# Altium PCB ALTAIR_PD_Squad_V26.5a_cut.PcbDoc (part 4 of 4)
Units mm, origin at the board's own origin, x right, y up, seen from the top; angles counter-clockwise.
Board outline 74 x 56 mm, 4 copper layers (Top Layer, Layer 2, Layer 3, Bottom Layer), stack 1.818 mm thick; 213 components, 155 nets, 610 pads, 404 vias.
Unrouted connection lines stored in the file: 6.
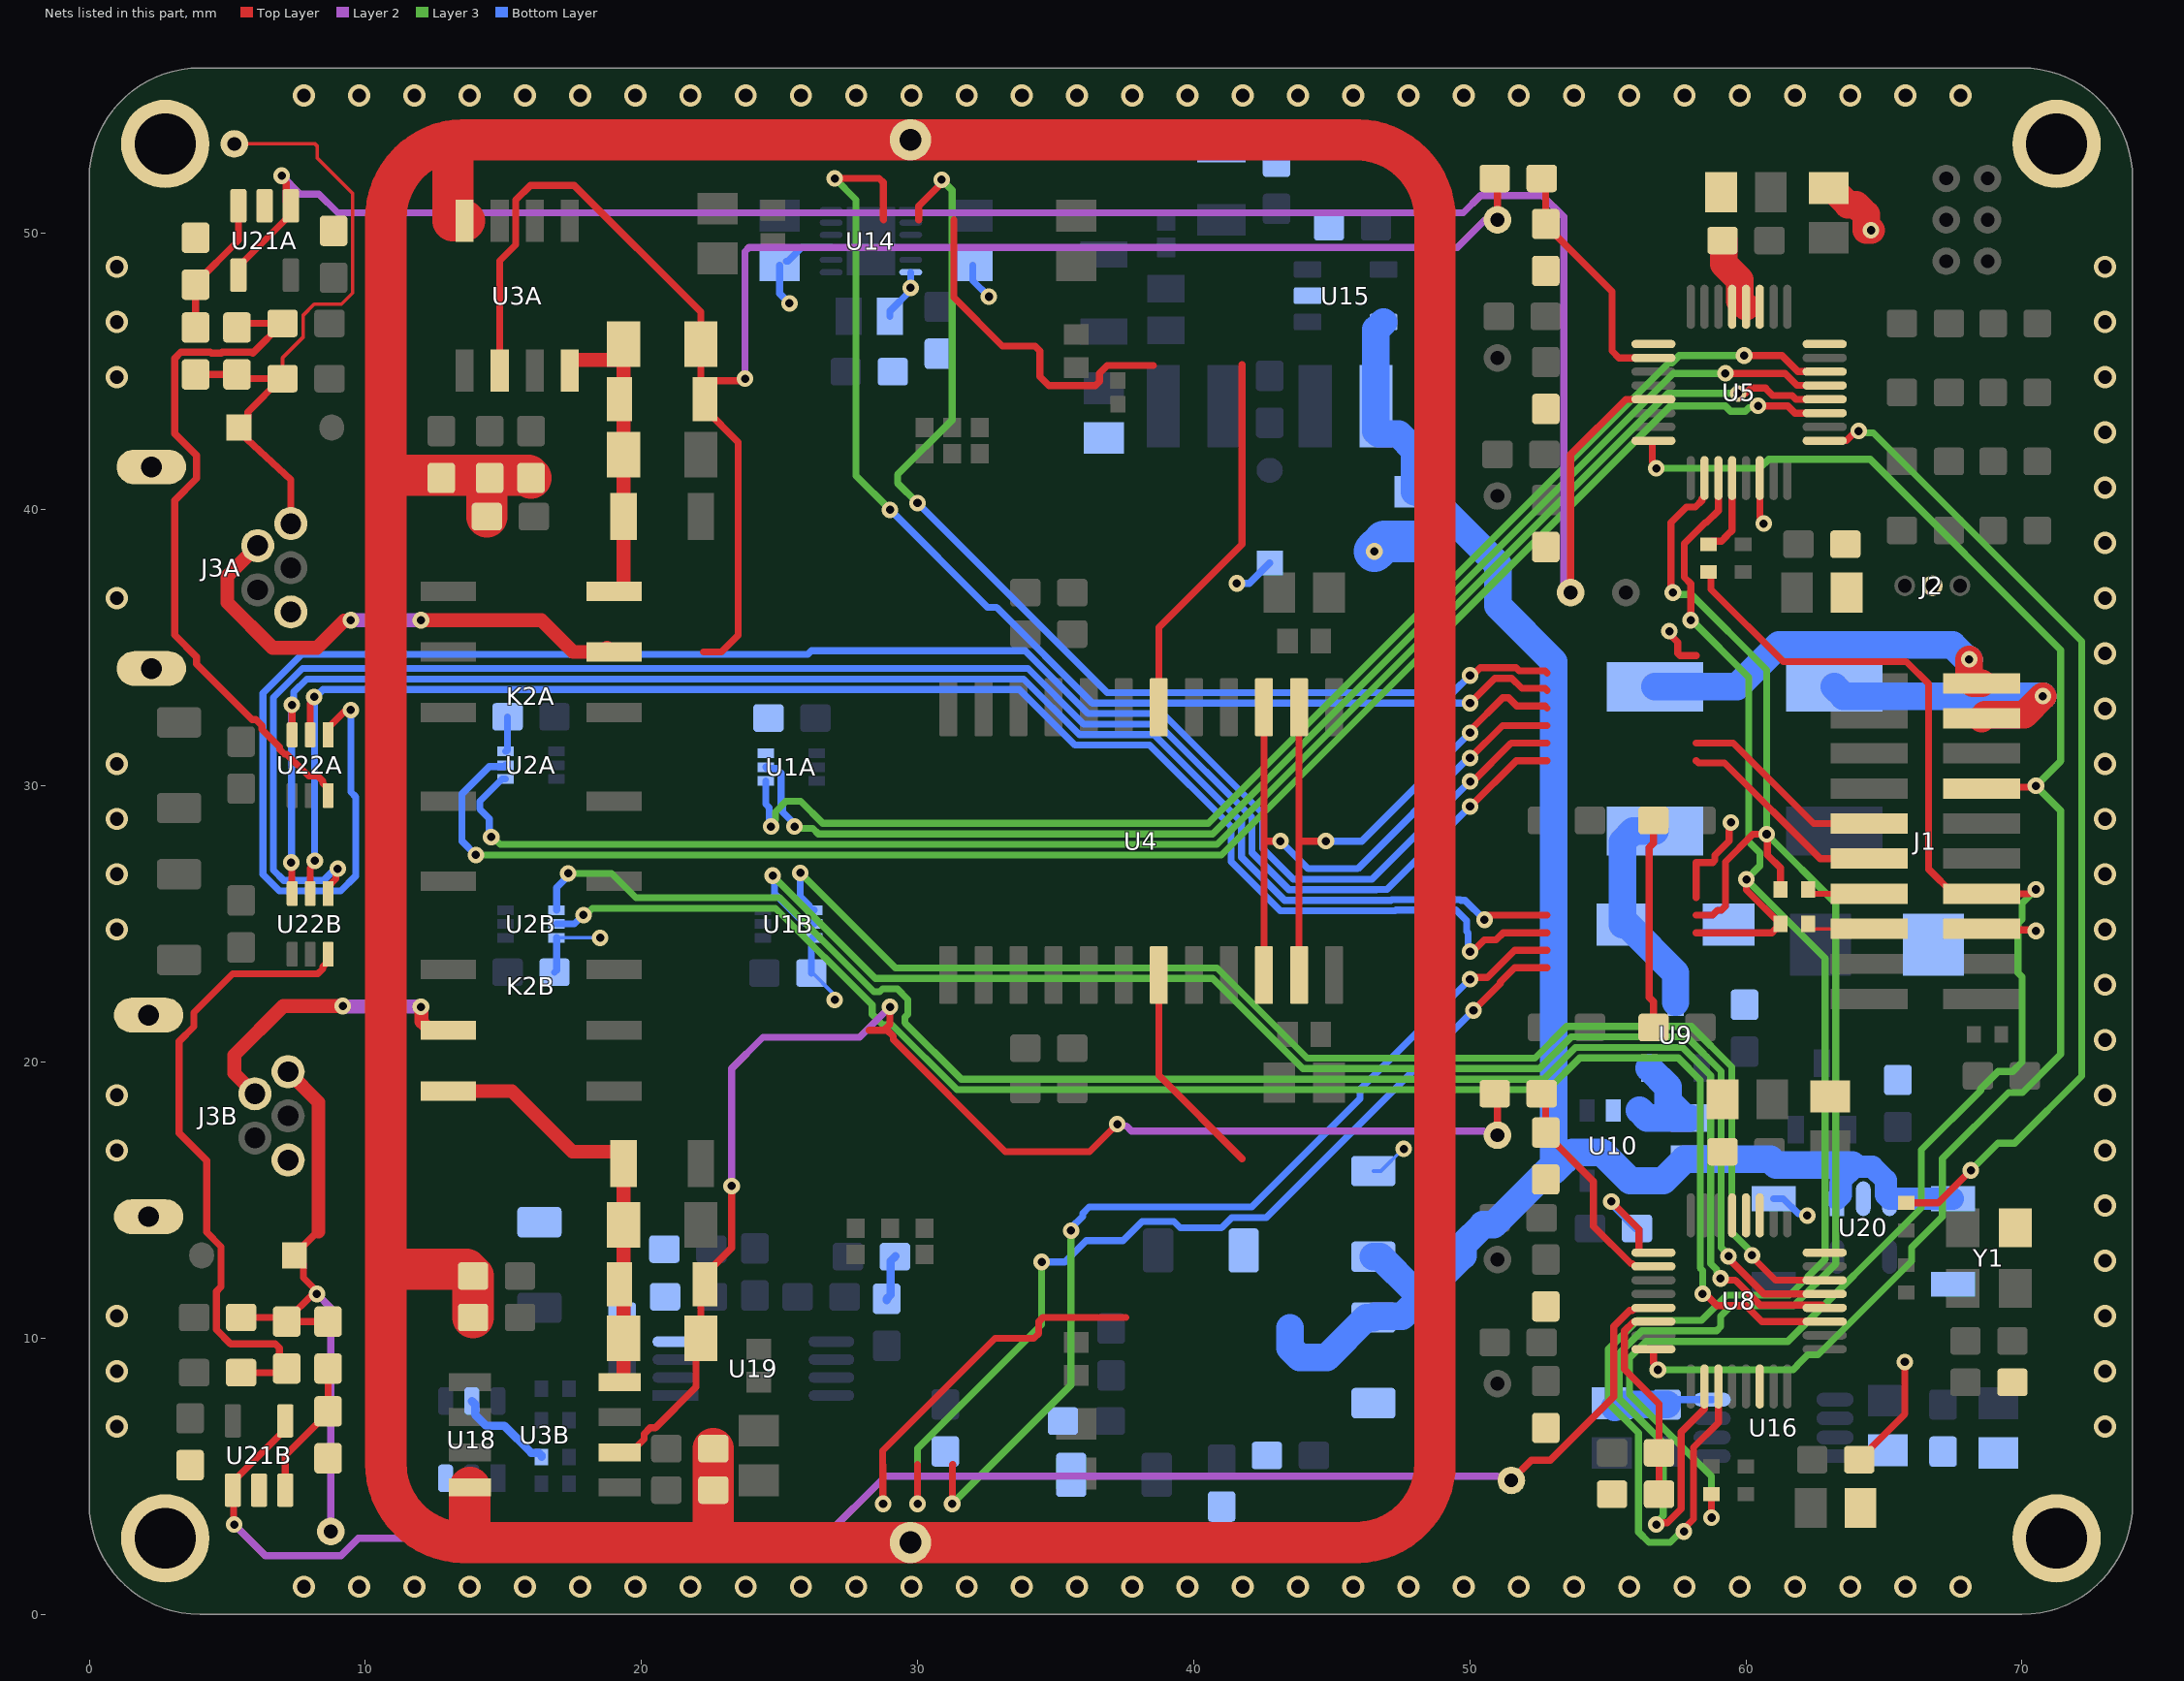
[diagram p5: the nets of this part, all layers, seen from the top]

## Via types
v1: diameter 0.6, hole 0.3, Top Layer to Bottom Layer, tented both sides, 303 vias
v2: diameter 0.8, hole 0.5, Top Layer to Bottom Layer, 97 vias
v3: diameter 0.6, hole 0.3, Top Layer to Bottom Layer, 4 vias

## Nets (pads, with @x,y where several pads share a name; then routed paths per layer and width w, separated by ;. In a path a pad name is that pad's centre, name@x,y a point inside that pad or via, vN(x,y) a via of type N, cw(c..) or ccw(c..) an arc to the next point about the centre after c; other vN are vias at no path point) (continued)
NetR51_1: R51.1 U18.5 | length 3.6
  Bottom Layer w0.3: U18.5@13.854,7.724 13.979,7.599 13.979,7.224 14.379,6.824 15.029,6.824 16.004,5.849 16.279,5.849 16.379,5.749 R51.1@16.379,5.699
NetR56A_1: R56A.1 R57A.2 U21A.3 | length 5.1
  Top Layer w0.254: R56A.1@3.85,46.5 R57A.2@3.85,48.15 ; R57A.2@3.85,48.2 5.4,49.75 5.4,50.95 U21A.3@5.35,51
NetR56B_1: R56B.1 R57B.2 U21B.3 | length 5
  Top Layer w0.254: U21B.3@7.1,4.55 7.1,5.75 R57B.2@8.65,7.3 ; R57B.2@8.65,7.35 R56B.1@8.65,9
NetU1A_1: U1A.1 U5.22 | length 48.1
  Top Layer w0.254: v1(59.935,45.585) 61.307,45.585 61.883,45.009 62.841,45.009 U5.22@62.85,45
  Layer 3 w0.254: v1(24.688,28.528) 24.688,28.622 24.853,28.786 24.853,29.062 25.232,29.441 25.768,29.441 26.566,28.643 40.527,28.643 57.202,45.319 57.319,45.319 57.585,45.585 v1(59.935,45.585)
  Bottom Layer w0.254: U1A.1@24.499,30.18 24.499,29.336 24.626,29.209 24.626,28.59 v1(24.688,28.528)
NetU1A_2: U1A.2 U5.21 | length 47.3
  Top Layer w0.254: v1(59.255,44.938) 61.415,44.938 61.844,44.509 62.841,44.509 U5.21@62.85,44.5
  Layer 3 w0.254: v1(25.542,28.528) 25.609,28.462 26.208,28.462 26.408,28.262 40.684,28.262 57.36,44.938 v1(59.255,44.938)
  Bottom Layer w0.254: U1A.2@24.499,30.68 24.547,30.632 24.881,30.632 25.053,30.46 25.053,29.31 25.118,29.246 25.118,29.047 25.542,28.622 v1(25.542,28.528)
NetU1B_1: U1B.1 U8.22 | length 49.4
  Top Layer w0.254: v1(60.222,13) 60.222,12.943 61.065,12.1 U8.22@62.85,12.1
  Layer 3 w0.254: v1(25.75,26.853) 29.194,23.409 40.841,23.409 44.107,20.143 52.362,20.143 53.509,21.29 58.018,21.29 59.484,19.825 59.484,13.832 60.222,13.094 v1(60.222,13)
  Bottom Layer w0.254: v1(25.75,26.853) 25.75,26 26.077,25.673 26.077,25.548 26.125,25.5 U1B.1@26.25,25.5
NetU1B_2: U1B.2 U8.21 | length 51.7
  Top Layer w0.254: v1(59.369,12.966) 59.369,12.881 60.65,11.6 U8.21@62.85,11.6
  Layer 3 w0.254: v1(24.75,26.75) 28.472,23.028 40.683,23.028 43.949,19.762 52.519,19.762 53.666,20.909 57.861,20.909 59.103,19.667 59.103,13.288 59.369,13.022 v1(59.369,12.966)
  Bottom Layer w0.254: v1(24.75,26.75) 24.816,26.684 24.816,26.1 25.868,25.048 26.202,25.048 U1B.2@26.25,25
NetU2A_1: U2A.1 U5.20 | length 58.1
  Top Layer w0.254: v1(59.709,44.214) 59.973,44.214 60.168,44.409 60.704,44.409 60.806,44.306 60.972,44.141 61.673,44.141 61.814,44 U5.20@62.85,44
  Layer 3 w0.254: v1(14.557,28.147) 14.613,28.147 14.879,27.881 40.842,27.881 57.175,44.214 v1(59.709,44.214)
  Bottom Layer w0.254: v1(14.557,28.147) 14.491,28.213 14.491,28.815 14.147,29.159 14.147,29.447 14.95,30.25 U2A.1@15.075,30.25
NetU2A_2: U2A.2 U5.19 | length 60.3
  Top Layer w0.254: v1(60.436,43.762) 60.438,43.76 61.515,43.76 61.775,43.5 U5.19@62.85,43.5
  Layer 3 w0.254: v1(14,27.5) 41,27.5 57.262,43.762 59.246,43.762 59.441,43.567 59.977,43.567 60.105,43.695 60.369,43.695 v1(60.436,43.762)
  Bottom Layer w0.254: v1(14,27.5) 13.5,28 13.5,29.713 14.489,30.702 15.027,30.702 U2A.2@15.075,30.75
NetU2B_1: U2B.1 U8.20 | length 59.3
  Top Layer w0.254: v1(59.076,12.164) 59.142,12.098 59.613,12.098 60.515,11.196 62.754,11.196 U8.20@62.85,11.1
  Layer 3 w0.254: v1(17.346,26.831) 18.919,26.831 19.8,25.95 25.012,25.95 28.418,22.543 28.628,22.543 28.732,22.647 29.268,22.647 29.647,22.268 29.647,21.732 29.543,21.628 29.543,21.418 31.58,19.381 52.677,19.381 53.824,20.528 57.703,20.528 58.722,19.509 58.722,12.698 58.938,12.481 58.938,12.395 59.076,12.258 v1(59.076,12.164)
  Bottom Layer w0.254: U2B.1@16.925,25.5 16.925,26.317 17.346,26.738 v1(17.346,26.831)
NetU2B_2: U2B.2 U8.19 | length 58
  Top Layer w0.254: v1(58.432,11.603) 58.526,11.603 58.952,11.177 59.996,11.177 60.572,10.6 U8.19@62.85,10.6
  Layer 3 w0.254: v1(17.897,25.325) 17.976,25.325 18.219,25.569 24.854,25.569 28.353,22.069 28.353,21.732 28.732,21.353 29.069,21.353 31.422,19 52.835,19 53.982,20.147 57.545,20.147 58.341,19.351 58.341,12.54 58.429,12.452 58.429,11.606 v1(58.432,11.603)
  Bottom Layer w0.254: U2B.2@16.925,25 17.572,25 v1(17.897,25.325)
NetU4_7: U4.7 | length 7.9
  Top Layer w0.254: U4.7@38.735,23.15 38.735,19.515 41.75,16.5
NetU4_10: U4.10 U4.15 | length 22.5
  Top Layer w0.254: U4.10@42.545,23.15 42.545,28 ; U4.15@42.545,32.85 42.545,28 ; v1(43.14,28) 42.545,28 ; v1(50.008,31.011) 51.179,32.183 52.8,32.183
  Bottom Layer w0.254: v1(43.14,28) 44.14,27 45.939,27 49.95,31.011 v1(50.008,31.011)
NetU4_11: U4.11 U4.14 | length 21
  Top Layer w0.254: U4.11@43.815,23.15 43.815,28 ; U4.14@43.815,32.85 43.815,28 ; v1(44.784,28) 43.815,28 ; v1(50.008,31.926) 50.008,32.008 51.192,33.192 51.402,33.192 51.698,32.896 52.722,32.896 52.8,32.818
  Bottom Layer w0.254: v1(44.784,28) 46.082,28 v1(50.008,31.926)
NetU4_18: U4.18 | length 13.6
  Top Layer w0.254: U4.18@38.735,32.85 38.735,35.735 41.75,38.75 41.75,45.25
NetU6A_10:  | length 12.4
  Top Layer w0.254: 31.31,50.5 31.31,47.69 33.071,45.929 34.252,45.929 34.429,45.752 34.429,44.821 34.75,44.5 36.439,44.5 36.588,44.649 36.588,44.947 36.87,45.229 38.546,45.229
NetU6A_11:  | length 40.9
  Top Layer w0.254: 30.04,50.5 30.04,51 30.804,51.764 30.804,51.884 v1(30.87,51.95) ; v1(50.008,34) 50.101,34 50.379,34.278 51.676,34.278 51.788,34.166 52.722,34.166 52.8,34.088
  Layer 3 w0.254: v1(29.997,40.247) 29.272,40.971 29.272,41.272 31.25,43.25 31.25,51.571 v1(30.87,51.95)
  Bottom Layer w0.254: v1(29.997,40.247) 36.862,33.381 49.389,33.381 v1(50.008,34)
NetU6A_12:  | length 43.3
  Top Layer w0.254: v1(27,52) 28.611,52 28.76,51.851 28.76,50.51 28.77,50.5 ; v1(50.008,33) 50.905,33.897 51.518,33.897 51.884,33.531 52.722,33.531 52.8,33.453
  Layer 3 w0.254: v1(27,52) 27.769,51.231 27.769,41.231 v1(29,40)
  Bottom Layer w0.254: v1(29,40) 32.533,36.467 32.862,36.467 36.328,33 v1(50.008,33)
NetU6B_10:  | length 13
  Top Layer w0.254: v1(28.75,4) 28.74,4.01 28.74,5.415 28.73,5.425 28.73,5.925 32.801,9.996 34.212,9.996 34.389,10.173 34.389,10.601 34.538,10.75 37.539,10.75
NetU6B_11:  | length 35
  Top Layer w0.254: v1(30,4) 30,5.425 ; v1(50.13,21.87) 51.106,22.845 51.106,22.899 51.619,23.413 52.8,23.413
  Layer 3 w0.254: v1(30,4) 30,6 34.491,10.491 v1(34.491,12.76)
  Bottom Layer w0.254: v1(34.491,12.76) 35.335,12.76 36.108,13.533 37.44,13.533 38.136,14.229 39.285,14.229 39.514,14 41.007,14 41.376,14.369 42.629,14.369 v1(50.13,21.87)
NetU6B_12:  | length 34.9
  Top Layer w0.254: v1(31.25,4) 31.26,4.01 31.26,5.415 31.27,5.425 ; v1(50.008,23) 50.074,23.066 50.638,23.066 51.619,24.048 52.8,24.048
  Layer 3 w0.254: v1(31.25,4) 35.555,8.305 v1(35.555,13.894)
  Bottom Layer w0.254: v1(35.555,13.894) 35.555,13.988 35.98,14.413 35.98,14.519 36.211,14.75 42.095,14.75 46.018,18.673 46.018,19.011 v1(50.008,23)
NetU12_14: U22A.1 | length 71.2
  Top Layer w0.254: U22A.1@8.65,31.85 8.65,32.1 9.234,32.684 9.406,32.684 v1(9.472,32.75) ; v1(50.011,30.157) 50.105,30.157 51.495,31.548 52.8,31.548
  Bottom Layer w0.254: v1(9.472,32.75) 9.472,29.781 9.647,29.607 9.647,26.732 9.11,26.195 6.889,26.195 6.287,26.797 6.287,33.358 7.693,34.764 26.02,34.764 26.154,34.898 33.892,34.898 36.171,32.619 38.881,32.619 42.493,29.007 42.493,27.732 43.606,26.619 44.881,26.619 46.454,26.619 49.992,30.157 v1(50.011,30.157)
NetU12_15: U22B.1 | length 62.5
  Top Layer w0.254: U22B.1@8.65,26.1 8.65,26.35 8.934,26.634 8.934,26.934 v1(9,27) ; v1(50.008,29.258) 50.027,29.258 51.681,30.913 52.8,30.913
  Bottom Layer w0.254: v1(9,27) 8.906,27 8.482,26.576 7.047,26.576 6.668,26.955 6.668,33.201 7.718,34.251 34,34.251 36.013,32.238 38.723,32.238 42.112,28.849 42.112,27.574 43.449,26.238 46.612,26.238 46.624,26.25 47,26.25 v1(50.008,29.258)
NetU13_12: U22A.3 U22B.3 | length 58.5
  Top Layer w0.254: v1(7.315,27.223) 7.333,27.206 7.333,26.117 U22B.3@7.35,26.1 ; v1(7.341,32.934) 7.345,32.929 7.345,31.855 U22A.3@7.35,31.85 ; v1(50.532,25.152) 50.697,25.318 52.8,25.318
  Bottom Layer w0.254: v1(7.315,27.223) 7.328,27.236 7.328,32.921 v1(7.341,32.934) 7.407,33 7.407,33.4 7.876,33.87 33.842,33.87 35.855,31.857 38.565,31.857 41.731,28.691 41.731,27.416 43.291,25.857 47.146,25.857 47.17,25.881 49.658,25.881 49.682,25.857 49.826,25.857 v1(50.532,25.152)
NetU13_13: U22A.2 U22B.2 | length 58.9
  Top Layer w0.254: U22B.2@8,26.1 8,27.026 8.167,27.193 v1(8.167,27.286) ; U22A.2@8,31.85 8,32.985 8.144,33.129 v1(8.144,33.223) ; v1(50.008,24) 50.101,24 50.527,24.425 50.95,24.425 51.207,24.683 52.8,24.683
  Bottom Layer w0.254: v1(8.144,33.223) 8.156,33.212 8.156,27.298 v1(8.167,27.286) ; v1@8.167,33.234 8.211,33.234 8.466,33.489 33.684,33.489 35.697,31.476 38.408,31.476 41.35,28.533 41.35,27.259 43.133,25.476 47.304,25.476 47.328,25.5 49.5,25.5 49.885,25.115 49.885,24.725 49.941,24.668 49.941,24.066 v1(50.008,24)
PD_AA: J3A.2 K2A.3 | length 17.9
  Top Layer w0.5: J3A.2@6.1,38.7 5,37.6 5,37.561 4.996,37.557 4.996,36.643 6.639,35 8.25,35 9.231,35.981 9.453,35.981 v1(9.472,36) ; v1(12.012,36) 16.372,36 17.522,34.85 18.6,34.85 K2A.3@18.75,35
  Layer 2 w0.5: v1@9.5,36 v1(12.012,36)
PD_AB: J3B.2 K2B.3 | length 10.9
  Top Layer w0.254: K2B.3@12.127,21.373 12.35,21.15 K2B.3@13,21.15
  Top Layer w0.5: J3B.2@6,18.85 5.25,19.6 5.25,20.25 7.029,22.029 v1(9.18,22.029) ; v1(12.012,22) 12.032,21.981 12.032,21.468 K2B.3@12.127,21.373
  Layer 2 w0.5: v1(9.18,22.029) 9.194,22.014 11.998,22.014 v1(12.012,22)
PD_KA: C00A.2 D8A.1 J3A.1 R0A.1 R56A.2 TP16A.1 | length 23
  Top Layer w0.127: 5.75,53.25 8.176,53.25 8.25,53.176 8.25,52.75 9.541,51.459 9.541,47.844 9.137,47.441 8.144,47.441 7.741,47.037 7.741,46.244 7,45.504 C00A.2@7,44.75
  Top Layer w0.254: R56A.2@3.85,44.9 5.2,44.9 R0A.1@5.275,44.825 ; R0A.1@5.35,44.9 5.5,44.75 C00A.2@7,44.75 6.95,44.75 5.743,43.543 5.743,43.348 D8A.1@5.395,43 ; D8A.1@5.42,43 5.5,42.75 7.3,41.095 J3A.1@7.3,39.5
PD_KB: C00B.2 D8B.1 J3B.1 R0B.1 R56B.2 TP16B.1 | length 23
  Top Layer w0.254: C00B.2@5.839,11.089 C00B.2@5.5,10.75 7,10.75 R0B.1@7.15,10.6 ; R0B.1@7.225,10.675 7.3,10.6 R56B.2@8.65,10.6 ; R0B.1@7.25,10.75 8.035,11.535 8.178,11.535 v1(8.245,11.602) 8.245,11.695 7.753,12.187 7.753,12.677 D8B.1@7.43,13 7.43,13.025 8.234,13.829 8.304,13.829
  Top Layer w0.5: J3B.1@7.2,19.65 8.304,18.546 8.304,13.858
  Layer 2 w0.254: v1(8.245,11.602) 8.75,11.096 TP16B.1@8.75,3
rSPI_MOSI: R30.2 U5.10 U8.10 | length 61.2
  Top Layer w0.254: v1(56.75,3.25) 56.816,3.316 57.152,3.316 57.654,3.818 57.654,6.599 58.491,7.436 58.491,8.241 U8.10@58.5,8.25 ; v1(57.353,37) 57.287,37.066 57.287,39.537 57.846,40.096 58.167,40.096 58.404,40.333 58.404,40.392 58.5,40.488 U5.10@58.5,41.15 ; 58.2,25.318 58.795,25.318 58.971,25.493 59.105,25.493 59.254,25.642 59.254,27.254 60.25,28.25 v1(60.75,28.25) 60.777,28.223 60.777,27.5 61.25,27.027 R30.2@61.25,26.25
  Layer 3 w0.254: v1(56.75,3.25) 56.75,3.322 57,3.572 57,6.211 55.401,7.81 55.401,9.438 56.226,10.264 58.932,10.264 59.081,10.412 59.081,10.798 59.46,11.177 61.733,11.177 63.25,12.694 63.25,25.75 v1(60.75,28.25) 60.75,34.2 58.016,36.934 57.419,36.934 v1(57.353,37)
rSPI_SCLK: R31.2 U5.11 U8.11 | length 60.7
  Top Layer w0.254: v1(57.75,3) 57.75,3.093 58.103,3.446 58.103,6.047 59,6.944 U8.11@59,8.25 ; v1(58,36) 58,37.315 57.764,37.551 57.764,38.773 58.528,39.537 58.568,39.537 59,39.969 U5.11@59,41.15 ; 58.2,24.683 60.933,24.683 61.077,24.827 61.127,24.827 61.25,24.95 R31.2@61.25,25 60.015,26.235 v1(60.015,26.614)
  Layer 3 w0.254: v1(57.75,3) 57.657,3 57.26,2.603 57.018,2.603 56.482,2.603 56.103,2.982 56.103,6.569 55.02,7.652 55.02,9.596 56.069,10.645 58.389,10.645 59.302,11.558 61.575,11.558 62.869,12.852 62.869,23.759 v1(60.015,26.614) 60.5,27.099 60.5,27.585 60.103,27.982 60.103,33.932 58.035,36 v1(58,36)
SPI_CS_DAC_CHA: J1.12 | length 7.5
  Top Layer w0.254: 58.2,31.548 59.541,31.548 62.453,28.635 J1.12@64.469,28.635
SPI_CS_DAC_CHB: J1.10 | length 7.7
  Top Layer w0.254: 58.2,30.913 58.278,30.835 59.222,30.835 62.691,27.365 J1.10@64.469,27.365
SPI_MISO: J1.07 R10.2 R20.2 | length 55.4
  Top Layer w0.254: R10.2@58.65,37.75 58.732,37.668 58.732,37.119 61.351,34.5 65.809,34.5 66.617,33.691 66.617,26.982 67.505,26.095 J1.07@68.533,26.095 70.251,26.095 70.406,26.25 v1(70.5,26.25) ; v1(58.75,3.5) R20.2@58.75,4.35
  Layer 3 w0.254: v1(58.75,3.5) 58.75,5 55.782,7.968 55.782,9.28 56.384,9.883 61.516,9.883 66.351,14.718 66.351,16.819 68.5,18.968 68.5,19.023 69.136,19.659 69.659,19.659 70,20 70,23.085 69.853,23.232 69.853,25.018 70,25.165 70,25.75 v1(70.5,26.25)
SPI_MISO_ADCA: R10.1 U5.12 | length 3
  Top Layer w0.254: R10.1@58.65,38.75 58.765,38.865 59.115,38.865 59.303,39.053 59.303,39.063 59.491,39.25 59.491,41.141 U5.12@59.5,41.15
SPI_MOSI: J1.08 R30.1 | length 2.3
  Top Layer w0.2: R30.1@62.25,26.25 62.25,26.245 62.4,26.095 J1.08@64.469,26.095
SPI_SCLK: J1.06 R31.1 | length 2.3
  Top Layer w0.127: R31.1@62.25,25 62.425,24.825 J1.06@64.469,24.825
STRT: J1.13 U5.8 U8.8 | length 57.8
  Top Layer w0.254: U8.8@56.65,9.6 56.65,9.108 56.81,8.948 v1(56.81,8.855) ; U5.8@56.65,42.5 56.629,42.479 56.61,42.479 56.61,41.734 56.75,41.594 v1(56.75,41.5) ; J1.13@68.533,29.905 68.581,29.953 70.452,29.953 v1(70.5,30)
  Layer 3 w0.254: v1(56.75,41.5) 60.507,41.5 60.831,41.824 64.495,41.824 71.397,34.922 71.397,30.897 v1(70.5,30) 71.397,29.103 71.397,20.279 70.015,18.897 69.507,18.897 67.113,16.504 67.113,14.402 66,13.289 66,12.789 62.608,9.397 62.232,9.397 61.853,9.018 61.853,9.003 61.704,8.855 v1(56.81,8.855)
SYS_CLK: R32.1 U5.17 | length 36.6
  Top Layer w0.254: U5.17@62.85,42.5 62.859,42.509 63.647,42.509 63.99,42.852 v1(64.084,42.852) ; R32.1@65.8,14.9 66.963,14.9 v1(68.141,16.078)
  Layer 3 w0.254: v1(64.084,42.852) 64.15,42.786 64.611,42.786 72.159,35.238 72.159,19.494 69.728,17.063 69.126,17.063 v1(68.141,16.078)
SYS_DVDD: F2.1 J1.17 | length 10.2
  Top Layer w1: J1.17@68.533,32.445 68.665,32.577 70.077,32.577 v1(70.75,33.25)
  Bottom Layer w1: F2.1@63.2,33.59 63.54,33.25 v1(70.75,33.25)
SYS_GND: C1A.1 C1B.1 C2A.1 C2B.1 C5A.1 C5B.1 C6A.1 C6B.1 C11.1 C12.1 C13.1 C14.1 C15.1 C16.1 C17.1 C18.1 C27.1 C28.1 C29.1 C30.1 C31.1 C32.1 C33.1 C34.1 C35.1 C36.1 C37.1 C39.1 C40.1 C43.2 C44.1 C46.2 C47.2 C48.2 C49.2 C50.2 C51.1 C52.2 C53.1 C54.2 C55.1 C56.1 C57.1 C58.1 C59.1 C60.1 C61.1 C62.2 C63.2 C64.1 C65.1 C66A.1 C66B.1 C71A.1 C71B.1 D1.2 D2.2 D4.1 H1.1 H2.1 H3.1 H4.1 J1.05 J2.2 J3A.5 J3A.6 J3B.5 J3B.6 R25.1 R28.1 R38.2 R39.2 R40.2 R41.1 R43.1 R44.1 R46.1 R53.1 R55.1 R57A.1 R57B.1 RT1A.1 RT1B.1 SH1.1 U1A.3 U1B.3 U2A.3 U2B.3 U3A.4 U3B.4 U5.1 U5.14 U5.24 U5.27 U5.28 U5.29 U8.1 U8.14 U8.24 U8.27 U8.28 U8.29 U10.2 U14.6 U14.9 U15.2 U16.4 U18.3 U19.4 U20.2 U21A.2 U21B.2 Y1.2 | length 75.6
  Top Layer w0.254: v1(55.125,14.946) 56.127,13.944 56.127,13.121 56.148,13.1 U8.1@56.65,13.1 ; C39.1@56.65,21.25 56.65,22.187 56.496,22.341 56.496,27.769 56.65,27.923 C40.1@56.65,28.75 ; v1(57.224,35.599) 57.224,35.505 57.527,35.202 57.527,34.801 57.605,34.723 58.2,34.723 ; 58.2,25.953 58.2,27.223 58.795,27.223 58.873,27.301 58.873,27.489 59.39,28.006 59.39,28.607 v1(59.456,28.673) ; U5.14@60.5,41.15 60.5,39.732 60.638,39.594 v1(60.638,39.5) ; C27.1@64.1,5.6 64.15,5.6 64.523,5.973 64.523,6.023 65.752,7.252 v1(65.752,9.138) ; J1.05@68.533,24.825 68.571,24.787 70.462,24.787 v1(70.5,24.75)
  Top Layer w1: C13.1@59.15,49.75 59.2,49.75 59.2,48.899 59.777,48.322 59.777,47.573 U5.28@60,47.35 ; C17.1@63,51.65 63.1,51.65 63.698,51.052 63.985,51.052 64.143,50.893 64.352,50.685 64.352,50.123 v1(64.528,50.123)
  Top Layer w1.5: 10.742,12.5 13.65,12.5 RT1B.1@13.9,12.25 C71B.1@13.9,10.75 ; 10.742,41.25 C6A.1@14.5,41.25 ; 12.666,53.245 13.17,52.741 13.17,50.475 13.182,50.462 U3A.4@13.595,50.462 ; 13.54,2.6 13.775,2.836 13.775,4.583 U3B.4@13.788,4.595 ; C71A.1@14.4,39.75 14.4,41.15 C6A.1@14.5,41.25 ; RT1A.1@16,41.15 15.9,41.25 C6A.1@14.5,41.25 ; C5B.1@22.6,6 C6B.1@22.6,4.5 22.6,2.75 22.75,2.6
  Bottom Layer w0.127: U2B.3@16.925,24.5 v1(18.5,24.5) ; C1B.1@26.151,23.221 26.201,23.221 26.909,22.513 26.909,22.341 v1(27,22.25) ; C56.1@46.5,16.05 46.776,16.05 47.579,16.853 v1(47.605,16.853)
  Bottom Layer w0.254: U2A.3@15.075,31.25 15.102,31.25 15.15,31.298 C2B.1@15.15,32.5 ; C2A.1@16.85,23.25 16.925,23.325 U2B.3@16.925,24.5 ; C43.2@25,48.85 25,47.835 v1(25.36,47.476) ; C43.2@25.25,49 25.3,49 25.8,49.5 U14.9@26.869,49.5 ; C1B.1@26.151,23.221 26.151,24.452 26.199,24.5 U1B.3@26.25,24.5 ; C47.2@29,47 29,47.2 29.747,47.947 v1(29.747,48.036) 29.749,48.038 29.749,48.599 U14.6@29.75,48.6 ; C48.2@32,48.85 32,48.298 v1(32.581,47.717) ; v1(41.559,37.336) 42.016,37.336 D4.1@42.75,38.07 ; v1(55.125,14.946) 55.191,14.88 55.191,14.784 56,13.975 C36.1@56.05,13.975 ; C50.2@57.25,7.513 57.512,7.775 U16.4@58.775,7.775 ; C63.2@61,15.05 61.35,15.05 61.897,14.503 62.156,14.503 v1(62.222,14.437)
  Bottom Layer w0.3: C65.1@28.879,11.374 C65.1@28.879,11.424 29.029,11.574 29.029,12.799 R55.1@29.179,12.949 R55.1@29.204,12.974
  Bottom Layer w1: C51.1@55.25,7.5 55.343,7.593 C50.2@57.139,7.593
  Bottom Layer w1.5: v1(46.542,38.494) 46.898,38.85 C44.1@48,38.85
  other v2: 7.775,1 9.775,1 11.775,1 13.775,1 15.775,1 17.775,1 19.775,1 21.775,1 23.775,1 25.775,1 27.775,1 29.775,1 31.775,1 33.775,1 35.775,1 37.775,1 39.775,1 41.775,1 43.775,1 45.775,1 47.775,1 49.775,1 51.775,1 53.775,1 55.775,1 57.775,1 59.775,1 61.775,1 63.775,1 65.775,1 67.775,1 1,6.8 73,6.8 1,8.8 73,8.8 1,10.8 73,10.8 73,12.8 73,14.8 1,16.8 73,16.8 1,18.8 73,18.8 73,20.8 73,22.8 1,24.8 73,24.8 1,26.8 73,26.8 1,28.8 73,28.8 1,30.8 73,30.8 73,32.8 73,34.8 1,36.8 73,36.8 73,38.8 73,40.8 73,42.8 1,44.8 73,44.8 1,46.8 73,46.8 1,48.8 73,48.8 7.775,55 9.775,55 11.775,55 13.775,55 15.775,55 17.775,55 19.775,55 21.775,55 23.775,55 25.775,55 27.775,55 29.775,55 31.775,55 33.775,55 35.775,55 37.775,55 39.775,55 41.775,55 43.775,55 45.775,55 47.775,55 49.775,55 51.775,55 53.775,55 55.775,55 57.775,55 59.775,55 61.775,55 63.775,55 65.775,55 67.775,55
SYS_VBAT: F1.1 J1.19 | length 13.5
  Top Layer w1: v1(68.082,34.582) 68.082,33.847 68.214,33.715 J1.19@68.533,33.715
  Bottom Layer w1: F1.1@56.7,33.59 59.673,33.59 61.19,35.107 67.475,35.107 68,34.582 v1(68.082,34.582)
SYS_VBAT_F: D1.1 F1.2 U9.3 | length 8
  Bottom Layer w1: F1.2@56.7,28.36 55.91,28.36 55.52,27.97 D1.1@55.52,24.975 55.7,24.975 57.45,23.225 U9.3@57.45,22.175
SYS_VBAT_RB: Rsense1.2 U9.2 U10.3 | length 4.2
  Bottom Layer w1: U10.3@56.15,18.25 56.425,17.975 Rsense1.2@57.95,17.975 ; U9.2@56.5,19.775 57.179,19.096 57.179,18.571 Rsense1.2@57.775,17.975
TIA_CHA_ADCIN: C15.2 R9.2 U5.2 | length 8.9
  Top Layer w0.254: R9.2@52.6,52 52.75,51.85 C15.2@52.75,50.35 C15.2@52.65,50.25 ; C15.2@52.9,50.25 52.9,50.15 55.15,47.9 55.15,45.75 55.4,45.5 U5.2@56.65,45.5
TIA_CHB_ADCIN: C31.2 R19.2 U8.2 | length 8.4
  Top Layer w0.254: R19.2@52.6,18.85 52.75,18.7 52.75,17.4 54.478,15.672 54.478,14.051 55.833,12.696 55.892,12.696 55.988,12.6 U8.2@56.65,12.6
TIA_INA: C3A.1 C4A.1 K2A.4 R1A.1 R2A.1 U3A.8 | length 11.9
  Top Layer w0.5: U3A.8@17.405,45.038 17.405,45.35 17.48,45.425 19,45.425 19.35,45.775 R2A.1@19.35,46 R1A.1@19.35,42 C3A.1@19.35,39.75 19.35,37.15 19.25,37.05 K2A.4@19,37.05
TIA_INB: C3B.1 C4B.1 K2B.4 R1B.1 R2B.1 U3B.8 | length 15.6
  Top Layer w0.5: K2B.4@13,18.95 15.3,18.95 17.5,16.75 19.125,16.75 19.35,16.525 C3B.1@19.35,16.321 R1B.1@19.35,14.11 19.35,11.943 19.35,9.852 19.35,8.48 19.275,8.405 U3B.8@19.212,8.405
TIA_OUTA: C4A.2 R2A.2 R9.1 T1.1 U3A.6 | length 64.6
  Top Layer w0.254: U3A.6@14.865,45.038 14.865,49.015 15.444,49.594 15.444,51.218 15.976,51.75 17.564,51.75 22.15,47.164 R2A.2@22.15,46 22.15,44.15 C4A.2@22.3,44 ; 22.25,34.85 22.9,34.85 23.504,35.454 23.504,42.446 22.3,43.65 22.3,44.35 22.623,44.673 23.579,44.673 23.656,44.75 v1(23.75,44.75) ; T1.1@50.9,50.5 51,50.6 51,51.9 R9.1@50.9,52
  Layer 2 w0.254: v1(23.75,44.75) 23.75,49.351 23.899,49.5 49.548,49.5 50.548,50.5 T1.1@50.75,50.5
TIA_OUTB: C4B.2 R2B.2 R19.1 T6.1 U3B.6 | length 49.9
  Top Layer w0.254: U3B.6@19.212,5.865 19.65,5.865 19.848,6.063 19.848,6.098 20.096,6.346 20.096,6.532 20.318,6.754 20.504,6.754 21.977,8.227 21.977,9.529 22.3,9.852 22.15,10.002 C4B.2@22.15,11.943 ; C4B.2@22.3,11.955 22.3,12.55 22.545,12.55 23.263,13.268 v1(23.263,15.513) ; 28.25,21.15 28.777,21.15 ; v1(29,22) 29,21.373 28.777,21.15 ; v1(37.23,17.75) 36.23,16.75 33.177,16.75 29.123,20.804 29.123,20.927 28.9,21.15 28.777,21.15 ; R19.1@50.9,18.85 51,18.75 T6.1@51,17.35
  Layer 2 w0.254: v1(23.263,15.513) 23.263,19.763 24.399,20.899 27.899,20.899 v1(29,22) ; v1(37.23,17.75) 37.296,17.684 37.566,17.684 37.75,17.5 50.5,17.5
VBAT: C44.2 C55.2 C56.2 C62.1 L1.1 Rsense1.1 U10.4 U15.5 U20.1 U20.3 | length 67.2
  Bottom Layer w0.8: U20.1@63.3,15.05 63.434,15.184 63.434,15.717 63.922,16.204 64.578,16.204 65.066,15.717 65.066,15.184 U20.3@65.2,15.05 C62.1@67.5,15.05
  Bottom Layer w1: 43.485,10.375 43.485,9.725 43.485,9.65 43.833,9.302 44.815,9.302 46.26,10.747 C55.2@46.51,10.747 46.56,10.797 47.547,10.797 49.746,12.996 49.746,13.369 50.481,14.104 50.854,14.104 53.041,16.291 ; C56.2@46.5,12.95 46.75,12.95 47.968,11.732 ; U15.5@46.875,46.8 46.6,46.525 L1.1@46.6,43.75 46.6,42.85 46.7,42.75 47.414,42.75 48,42.164 C44.2@48,40.65 ; C44.2@48.15,40.65 48.748,40.052 48.985,40.052 51.013,38.024 51.013,36.524 53.041,34.495 53.041,16.053 53.715,16.727 54.785,16.727 55.812,15.7 U10.4@56.15,15.7 57,15.7 57.775,16.475 Rsense1.1@57.95,16.475 60.888,16.475 61.088,16.275 63.851,16.275
VBIAS_CHA_ADCIN: TP4.1 U5.5 U21A.1 U21A.4 | length 74.5
  Top Layer w0.254: U21A.4@5.4,48.495 5.4,48.805 7.122,50.527 7.132,50.527 7.35,50.745 U21A.1@7.35,51.005 ; v1(6.973,52.096) 6.973,52.002 7.132,51.843 7.132,51.173 U21A.1@7.3,51.005 ; TP4.1@53.65,37 53.65,42 55.65,44 U5.5@56.65,44
  Layer 2 w0.254: v1(6.973,52.096) 7.636,51.433 8.322,51.433 8.998,50.756 49.76,50.756 50.385,51.381 52.626,51.381 53.4,50.607 TP4.1@53.4,37
VBIAS_CHB_ADCIN: TP9.1 U8.5 U21B.1 U21B.4 | length 61.8
  Top Layer w0.254: v1(5.25,3.25) 5.225,3.275 5.225,4.47 U21B.1@5.2,4.495 5.2,4.805 5.368,4.973 5.378,4.973 7.1,6.695 U21B.4@7.1,7.005 ; TP9.1@51.5,4.85 52.23,5.58 52.916,5.58 55.215,7.879 55.215,10.425 55.794,11.004 55.892,11.004 55.988,11.1 U8.5@56.65,11.1
  Layer 2 w0.254: v1(5.25,3.25) 6.381,2.119 9.115,2.119 9.746,2.75 26.585,2.75 28.835,5 50.978,5 50.985,4.993 51.357,4.993 TP9.1@51.5,4.85
VBIASA: C0A.2 R0A.2 U22A.6 | length 25.3
  Top Layer w0.254: R0A.2@5.35,46.6 5.5,46.75 C0A.2@7,46.75 5.919,45.669 5.917,45.669 5.882,45.704 4.818,45.704 4.783,45.669 4.417,45.669 4.382,45.704 3.318,45.704 3.096,45.482 3.096,42.761 3.889,41.968 3.889,41.132 3.096,40.339 3.096,35.461 3.889,34.668 3.889,34.411 5.896,32.404 6.032,32.404 6.254,32.182 6.254,32.046 6.896,31.404 6.896,31.324 7.074,31.146 7.154,31.146 7.946,30.354 8.276,30.354 8.454,30.176 8.454,30.096 8.577,29.973 8.577,29.723 U22A.6@8.65,29.65
VBIASB: C0B.2 R0B.2 U22B.6 | length 23.3
  Top Layer w0.254: C0B.2@5.4,8.75 R0B.2@7,8.75 ; R0B.2@7.15,8.9 6.89,9.16 6.89,9.647 6.741,9.796 5.118,9.796 4.604,10.31 4.604,11.693 4.774,11.863 4.774,13.317 4.25,13.841 4.25,16.428 3.25,17.428 3.25,20.743 3.789,21.282 3.789,21.789 5.196,23.196 8.276,23.196 8.454,23.374 8.454,23.428 8.454,23.454 8.65,23.65 U22B.6@8.65,23.9
VGND_ADCIN: C35.2 R24.2 U8.6 | length 7.6
  Top Layer w0.254: U8.6@56.65,10.6 56.641,10.591 55.92,10.591 55.596,10.267 55.596,8.872 56.85,7.618 R24.2@56.85,5.85 C35.2@56.85,4.35
pads on no net: K2A.5 K2A.6 K2A.7 K2B.5 K2B.6 K2B.7 U3A.3 U3B.3 U5.25 U8.25 U14.4 U14.7 U16.1 U16.3 U16.7 U16.8

## Polygon pours and split planes (outlines as drawn)
SYS_GND on Top Layer "TOP_GND" (solid, pour order 315): 4,0 70,0 ccw(c70,4) 74,4 74,52 ccw(c70,52) 70,56 4,56 ccw(c4,52) 0,52 0,4 ccw(c4,4)
4V9 on Top Layer "4V9_L01_P314" (solid, pour order 314): 21 vertices, not listed, extent 2.5,2 55.5,54
GUARDA on Top Layer "GUARDA2" (solid, pour order 225): 627 vertices, not listed, extent 10.893,29.879 32.311,47.691
GUARDB on Top Layer "GuardB1" (solid, pour order 277): 529 vertices, not listed, extent 10.893,7.214 33.736,26.371
GUARDB on Top Layer "IVC_GUARDB" (solid, pour order 308): 33.313,9.989 26.813,9.989 26.813,14.766 27.414,15.367 33.313,15.367
GUARDA on Top Layer "IVC_GUARDA" (solid, pour order 292): 26.799,46 33.299,46 33.299,41.341 32.708,40.75 26.799,40.75
GUARDA on Top Layer "ACF_GUARDA" (solid, pour order 307): 31.851,31.171 31.151,31.871 31.151,36.571 32.851,38.271 36.851,38.271 38.261,36.861 38.261,31.171
GUARDB on Top Layer "ACF_GUARDB" (solid, pour order 306): 31.795,24.895 31.095,24.195 31.095,19.495 32.795,17.795 36.795,17.795 38.205,19.205 38.205,24.895
GUARDB on Top Layer "GuardB2" (solid, pour order 281): 195 vertices, not listed, extent 4.129,17.374 10.592,23.121
GUARDA on Top Layer "GUARDA1" (solid, pour order 273): 259 vertices, not listed, extent 3.875,33.879 10.592,40.176
GUARDA on Top Layer "GUARDA0" (solid, pour order 275): 29.93,33.975 29.863,33.887 29.712,33.771 29.92,33.771 29.92,33.851 29.927,33.908 29.927,33.964
no net on Top Solder "GuardB1" (solid, pour order 316): 529 vertices, not listed, extent 10.893,7.214 33.736,26.371
no net on Top Solder "GUARDA2" (solid, pour order 310): 627 vertices, not listed, extent 10.893,29.879 32.311,47.691
no net on Top Solder "IVCCHA" (solid): 26.799,46 33.299,46 33.299,41.341 32.708,40.75 26.799,40.75
no net on Top Solder "ACFCHA" (solid): 31.851,31.171 31.151,31.871 31.151,36.571 32.851,38.271 36.851,38.271 38.261,36.861 38.261,31.171
no net on Top Solder "ACFCHB" (solid): 31.795,24.895 31.095,24.195 31.095,19.495 32.795,17.795 36.795,17.795 38.205,19.205 38.205,24.895
no net on Top Solder "IVCCHB" (solid): 33.313,9.989 26.813,9.989 26.813,14.766 27.414,15.367 33.313,15.367
no net on Top Solder "Edge_Plating" (solid): 18 vertices, not listed, extent -0.05,0 74,56
no net on Bottom Solder "Edge_Plating_B" (solid): 18 vertices, not listed, extent -0.05,0 74,56
SYS_GND on Layer 2 "L2_SYS_GND" (solid, pour order 317): 4,0 70,0 ccw(c70,4) 74,4 74,52 ccw(c70,52) 70,56 4,56 ccw(c4,52) 0,52 0,4 ccw(c4,4)
4V9 on Layer 2 "L1_VGND" (solid, pour order 313): 36.764,38.534 49.725,38.534 49.725,35.784 55.475,35.784 55.475,20.034 49.475,20.034 49.475,18.034 43.225,18.034 36.968,18.034 36.968,2.034 1.725,2.034 1.725,54.034 36.678,54.034
GUARDB on Layer 2 "GUARDB_L02_P312" (solid, pour order 312): 195 vertices, not listed, extent 4.129,17.374 10.592,23.121
GUARDA on Layer 2 "GUARDA_L02_P289" (solid, pour order 289): 259 vertices, not listed, extent 3.875,33.879 10.592,40.176
GUARDA on Layer 2 "GUARDA_L02_P293" (solid, pour order 293): 627 vertices, not listed, extent 10.893,29.879 32.311,47.691
GUARDB on Layer 2 "GUARDB_L02_P294" (solid, pour order 294): 529 vertices, not listed, extent 10.893,7.214 33.736,26.371
SYS_GND on Bottom Layer "B_SYS_GND" (solid, pour order 285): 4,0 70,0 ccw(c70,4) 74,4 74,52 ccw(c70,52) 70,56 4,56 ccw(c4,52) 0,52 0,4 ccw(c4,4)
SYS_GND on Layer 3 "L3_SYS_GND" (solid, pour order 295): 4,0 70,0 ccw(c70,4) 74,4 74,52 ccw(c70,52) 70,56 4,56 ccw(c4,52) 0,52 0,4 ccw(c4,4)

## Other copper
Top Layer:
  pour cut-out: 14.097,19.534 14.179,19.479 14.193,19.459 15.3,19.459 15.325,19.454 15.35,19.454 15.447,19.434 15.501,19.412 15.539,19.397 15.621,19.341 15.639,19.324 15.66,19.31 17.711,17.259 18.639,17.259 18.641,17.268 18.696,17.35 18.778,17.405 18.875,17.424 19.825,17.424 19.922,17.405 20.004,17.35 20.059,17.268 20.079,17.171 20.079,15.471 20.059,15.373 20.004,15.291 19.922,15.236 19.859,15.223 19.859,15.189 19.95,15.189 20.047,15.17 20.129,15.115 20.184,15.032 20.204,14.935 20.204,13.285 20.184,13.188 20.129,13.106 20.047,13.051 19.95,13.031 19.859,13.031 19.859,12.891 19.884,12.853 19.904,12.755 19.904,11.155 19.887,11.073 19.95,11.073 20.047,11.054 20.129,10.999 20.184,10.917 20.204,10.819 20.204,9.169 20.184,9.072 20.129,8.99 20.081,8.958 20.154,8.909 20.209,8.827 20.228,8.73 20.228,8.08 20.209,7.983 20.154,7.901 20.072,7.846 19.975,7.826 18.45,7.826 18.352,7.846 18.27,7.901 18.215,7.983 18.196,8.08 18.196,8.73 18.215,8.827 18.27,8.909 18.352,8.964 18.45,8.984 18.58,8.984 18.571,8.99 18.516,9.072 18.496,9.169 18.496,10.819 18.516,10.917 18.563,10.987 18.516,11.058 18.496,11.155 18.496,12.755 18.516,12.853 18.571,12.935 18.653,12.99 18.75,13.009 18.841,13.009 18.841,13.031 18.75,13.031 18.653,13.051 18.571,13.106 18.516,13.188 18.496,13.285 18.496,14.935 18.516,15.032 18.571,15.115 18.653,15.17 18.75,15.189 18.841,15.189 18.841,15.223 18.778,15.236 18.696,15.291 18.641,15.373 18.621,15.471 18.621,16.241 17.5,16.241 17.475,16.246 17.45,16.246 17.353,16.266 17.299,16.288 17.261,16.303 17.179,16.359 17.161,16.376 17.14,16.39 15.089,18.441 14.193,18.441 14.179,18.421 14.097,18.366 14,18.346 12,18.346 11.903,18.366 11.821,18.421 11.766,18.503 11.746,18.6 11.746,19.3 11.766,19.397 11.821,19.479 11.903,19.534 12,19.554 14,19.554
  pour cut-out: 23.347,19.534 23.429,19.479 23.477,19.409 24.987,19.409 25.011,19.404 25.036,19.404 25.134,19.384 25.187,19.362 25.225,19.347 25.308,19.291 25.325,19.274 25.346,19.26 27.847,16.759 31.5,16.759 31.525,16.754 31.55,16.754 31.647,16.734 31.701,16.712 31.739,16.697 31.821,16.641 31.839,16.624 31.86,16.61 32.9,15.57 32.914,15.549 32.931,15.531 32.987,15.449 33.024,15.357 33.044,15.26 33.044,15.16 33.029,15.085 33.044,15.01 33.044,14.985 33.049,14.96 33.049,12.045 33.054,12.037 33.088,11.986 33.103,11.948 33.111,11.909 33.123,11.851 33.123,10.299 33.116,10.264 33.103,10.202 33.088,10.164 33.058,10.119 33.033,10.082 33.002,10.061 32.951,10.027 32.913,10.012 32.874,10.004 32.816,9.992 32.264,9.992 32.229,9.999 32.167,10.012 32.129,10.027 32.084,10.057 32.047,10.082 32.026,10.113 31.992,10.164 31.977,10.202 31.969,10.241 31.957,10.299 31.957,11.851 31.964,11.886 31.977,11.948 31.992,11.986 32.022,12.031 32.031,12.045 32.031,14.96 32.036,14.985 32.036,14.994 31.289,15.741 27.637,15.741 27.612,15.746 27.587,15.746 27.489,15.766 27.436,15.788 27.398,15.803 27.315,15.859 27.298,15.876 27.277,15.89 24.776,18.391 23.386,18.391 23.347,18.366 23.25,18.346 21.25,18.346 21.153,18.366 21.071,18.421 21.016,18.503 20.996,18.6 20.996,19.3 21.016,19.397 21.071,19.479 21.153,19.534 21.25,19.554 23.25,19.554
  pour cut-out: 12.159,22.484 12.213,22.462 12.251,22.447 12.334,22.391 12.351,22.374 12.372,22.36 12.391,22.341 12.405,22.32 12.423,22.302 12.478,22.219 12.516,22.128 12.526,22.079 12.535,22.03 12.535,22.005 12.54,21.981 12.54,21.754 14,21.754 14.097,21.734 14.179,21.679 14.234,21.597 14.254,21.5 14.254,20.8 14.234,20.703 14.179,20.621 14.097,20.566 14,20.546 12,20.546 11.903,20.566 11.821,20.621 11.766,20.703 11.746,20.8 11.746,21.034 11.672,21.109 11.658,21.13 11.64,21.147 11.585,21.23 11.547,21.321 11.537,21.37 11.528,21.419 11.528,21.444 11.523,21.468 11.523,21.879 11.509,21.95 11.509,22.05 11.528,22.147 11.55,22.201 11.566,22.239 11.621,22.321 11.668,22.368 11.691,22.391 11.774,22.447 11.865,22.484 11.963,22.504 12.062,22.504
  pour cut-out: 14.097,23.934 14.179,23.879 14.234,23.797 14.254,23.7 14.254,23.416 14.911,22.759 20.75,22.759 20.775,22.754 20.8,22.754 20.897,22.734 20.951,22.712 20.989,22.697 21.071,22.641 21.089,22.624 21.11,22.61 21.86,21.86 21.874,21.839 21.891,21.821 21.928,21.766 21.936,21.754 23.25,21.754 23.347,21.734 23.429,21.679 23.484,21.597 23.504,21.5 23.504,20.8 23.484,20.703 23.429,20.621 23.347,20.566 23.25,20.546 21.25,20.546 21.153,20.566 21.071,20.621 21.016,20.703 20.996,20.8 20.996,21.273 20.996,21.284 20.539,21.741 14.7,21.741 14.675,21.746 14.65,21.746 14.553,21.766 14.477,21.797 14.461,21.803 14.434,21.822 14.379,21.859 14.361,21.876 14.34,21.89 13.484,22.746 12,22.746 11.903,22.766 11.821,22.821 11.766,22.903 11.746,23 11.746,23.7 11.766,23.797 11.821,23.879 11.903,23.934 12,23.954 14,23.954
  pour cut-out: 30.525,25.754 30.55,25.754 30.647,25.734 30.701,25.712 30.739,25.697 30.821,25.641 30.839,25.624 30.86,25.61 31.475,24.994 31.489,24.973 31.507,24.956 31.544,24.901 31.562,24.873 31.6,24.782 31.619,24.684 31.619,24.659 31.624,24.635 31.624,24.345 31.63,24.337 31.663,24.286 31.679,24.248 31.687,24.209 31.698,24.151 31.698,22.149 31.691,22.114 31.679,22.052 31.663,22.014 31.633,21.969 31.608,21.932 31.577,21.911 31.526,21.877 31.489,21.862 31.45,21.854 31.392,21.842 30.839,21.842 30.804,21.849 30.742,21.862 30.705,21.877 30.66,21.907 30.622,21.932 30.601,21.963 30.567,22.014 30.552,22.052 30.544,22.091 30.533,22.149 30.533,24.151 30.54,24.186 30.552,24.248 30.567,24.286 30.598,24.331 30.607,24.345 30.607,24.424 30.289,24.741 24.761,24.741 23.504,23.484 23.504,23 23.484,22.903 23.429,22.821 23.347,22.766 23.25,22.746 21.25,22.746 21.153,22.766 21.071,22.821 21.016,22.903 20.996,23 20.996,23.7 21.016,23.797 21.071,23.879 21.153,23.934 21.25,23.954 21.891,23.954 21.929,23.991 22.011,24.047 22.103,24.084 22.2,24.104 22.225,24.104 22.25,24.109 22.689,24.109 24.19,25.61 24.211,25.624 24.229,25.641 24.311,25.697 24.403,25.734 24.452,25.744 24.5,25.754 24.525,25.754 24.55,25.759 30.5,25.759
  pour cut-out: 9.497,22.504 9.522,22.504 9.619,22.484 9.711,22.447 9.794,22.391 9.864,22.321 9.919,22.239 9.957,22.147 9.976,22.05 9.976,21.95 9.957,21.853 9.919,21.761 9.864,21.679 9.794,21.609 9.711,21.553 9.619,21.516 9.522,21.496 9.497,21.496 9.472,21.491 7.211,21.491 5.759,20.039 5.759,19.811 5.874,19.695 5.95,19.711 6.05,19.711 6.284,19.664 6.31,19.653 6.375,19.626 6.574,19.494 6.644,19.424 6.776,19.225 6.798,19.172 6.814,19.134 6.861,18.9 6.861,18.8 6.814,18.566 6.803,18.54 6.776,18.475 6.644,18.276 6.574,18.206 6.375,18.074 6.322,18.052 6.284,18.036 6.05,17.989 5.95,17.989 5.716,18.036 5.69,18.047 5.625,18.074 5.426,18.206 5.356,18.276 5.224,18.475 5.202,18.528 5.186,18.566 5.139,18.8 5.139,18.9 5.155,18.976 4.89,19.24 4.876,19.261 4.859,19.279 4.803,19.361 4.766,19.453 4.756,19.502 4.746,19.55 4.746,19.575 4.741,19.6 4.741,20.25 4.746,20.275 4.746,20.3 4.766,20.397 4.788,20.451 4.803,20.489 4.859,20.571 4.876,20.589 4.89,20.61 6.64,22.36 6.661,22.374 6.679,22.391 6.748,22.437 6.761,22.447 6.853,22.484 6.95,22.504 6.975,22.504 7,22.509 9.472,22.509
  pour cut-out: 31.427,34.151 31.489,34.138 31.526,34.123 31.571,34.093 31.608,34.068 31.63,34.037 31.663,33.986 31.679,33.948 31.687,33.909 31.698,33.851 31.698,31.849 31.691,31.814 31.679,31.752 31.663,31.714 31.633,31.669 31.608,31.632 31.577,31.611 31.526,31.577 31.489,31.562 31.45,31.554 31.392,31.542 30.839,31.542 30.804,31.549 30.742,31.562 30.705,31.577 30.66,31.607 30.622,31.632 30.601,31.663 30.567,31.714 30.552,31.752 30.544,31.791 30.533,31.849 30.533,32.141 29.443,32.141 29.429,32.121 29.347,32.066 29.25,32.046 27.25,32.046 27.153,32.066 27.071,32.121 27.016,32.203 26.996,32.3 26.996,33 27.016,33.097 27.071,33.179 27.153,33.234 27.25,33.254 29.25,33.254 29.347,33.234 29.429,33.179 29.443,33.159 30.533,33.159 30.533,33.851 30.54,33.886 30.552,33.948 30.567,33.986 30.598,34.031 30.622,34.068 30.654,34.089 30.705,34.123 30.742,34.138 30.781,34.146 30.839,34.158 31.392,34.158
  pour cut-out: 16.397,36.504 16.422,36.504 16.52,36.484 16.573,36.462 16.611,36.447 16.694,36.391 16.711,36.374 16.732,36.36 17.733,35.359 17.807,35.359 17.821,35.379 17.903,35.434 18,35.454 18.529,35.454 18.603,35.484 18.7,35.504 18.8,35.504 18.897,35.484 18.951,35.462 18.971,35.454 20,35.454 20.097,35.434 20.179,35.379 20.234,35.297 20.254,35.2 20.254,34.5 20.234,34.403 20.179,34.321 20.097,34.266 20,34.246 18,34.246 17.903,34.266 17.821,34.321 17.807,34.341 17.522,34.341 17.498,34.346 17.473,34.346 17.375,34.366 17.3,34.397 17.284,34.403 17.256,34.422 17.201,34.459 17.184,34.476 17.163,34.49 16.162,35.491 12.012,35.491 11.988,35.496 11.963,35.496 11.865,35.516 11.774,35.553 11.691,35.609 11.621,35.679 11.566,35.761 11.528,35.853 11.509,35.95 11.509,36.05 11.528,36.147 11.566,36.239 11.621,36.321 11.691,36.391 11.774,36.447 11.865,36.484 11.963,36.504 11.988,36.504 12.012,36.509 16.372,36.509
  pour cut-out: 29.347,35.434 29.429,35.379 29.484,35.297 29.504,35.2 29.504,34.5 29.484,34.403 29.429,34.321 29.347,34.266 29.25,34.246 27.25,34.246 27.153,34.266 27.071,34.321 27.057,34.341 26.561,34.341 25.509,33.289 25.509,31.25 25.504,31.225 25.504,31.2 25.484,31.103 25.447,31.011 25.41,30.956 25.391,30.929 25.374,30.911 25.36,30.89 25.11,30.64 25.089,30.626 25.071,30.609 24.989,30.553 24.897,30.516 24.848,30.506 24.8,30.496 24.775,30.496 24.75,30.491 20.75,30.491 20.725,30.496 20.7,30.496 20.603,30.516 20.527,30.547 20.511,30.553 20.484,30.572 20.429,30.609 20.411,30.626 20.39,30.64 19.513,31.517 19.499,31.538 19.482,31.556 19.426,31.638 19.389,31.73 19.379,31.779 19.369,31.827 19.369,31.852 19.364,31.877 19.364,32.046 18,32.046 17.903,32.066 17.821,32.121 17.766,32.203 17.746,32.3 17.746,33 17.766,33.097 17.821,33.179 17.903,33.234 18,33.254 20,33.254 20.097,33.234 20.179,33.179 20.234,33.097 20.254,33 20.254,32.759 20.264,32.748 20.32,32.666 20.34,32.617 20.357,32.574 20.369,32.518 20.377,32.477 20.377,32.452 20.382,32.427 20.382,32.088 20.961,31.509 24.491,31.509 24.491,33.5 24.496,33.525 24.496,33.55 24.516,33.647 24.538,33.701 24.553,33.739 24.609,33.821 24.626,33.839 24.64,33.86 25.99,35.21 26.011,35.224 26.029,35.241 26.084,35.278 26.111,35.297 26.203,35.334 26.3,35.354 26.325,35.354 26.35,35.359 27.057,35.359 27.071,35.379 27.153,35.434 27.25,35.454 29.25,35.454
  pour cut-out: 163 vertices and 0 holes, not listed, extent 4.487,34.491 9.976,39.561
  pour cut-out: 27.811,45.926 27.873,45.913 27.911,45.898 27.956,45.868 27.993,45.843 28.014,45.812 28.048,45.761 28.063,45.723 28.071,45.684 28.083,45.626 28.083,44.074 28.076,44.039 28.063,43.977 28.048,43.939 28.018,43.894 28.009,43.88 28.009,40.461 28.61,39.86 28.624,39.839 28.641,39.821 28.678,39.766 28.697,39.739 28.734,39.647 28.754,39.55 28.754,39.525 28.759,39.5 28.759,37.654 29.25,37.654 29.347,37.634 29.429,37.579 29.484,37.497 29.504,37.4 29.504,36.7 29.484,36.603 29.429,36.521 29.347,36.466 29.25,36.446 27.25,36.446 27.153,36.466 27.071,36.521 27.016,36.603 26.996,36.7 26.996,37.4 27.016,37.497 27.071,37.579 27.153,37.634 27.25,37.654 27.741,37.654 27.741,39.289 27.14,39.89 27.126,39.911 27.109,39.929 27.053,40.011 27.016,40.103 27.006,40.152 26.996,40.2 26.996,40.225 26.991,40.25 26.991,43.88 26.986,43.888 26.952,43.939 26.937,43.977 26.929,44.016 26.917,44.074 26.917,45.626 26.924,45.661 26.937,45.723 26.952,45.761 26.982,45.806 27.007,45.843 27.038,45.864 27.089,45.898 27.127,45.913 27.166,45.921 27.224,45.933 27.776,45.933
  pour cut-out: 20.047,47.059 20.129,47.004 20.184,46.922 20.204,46.825 20.204,45.175 20.184,45.078 20.129,44.996 20.047,44.941 19.95,44.921 19.868,44.921 19.884,44.897 19.904,44.8 19.904,43.2 19.884,43.103 19.868,43.079 19.95,43.079 20.047,43.059 20.129,43.004 20.184,42.922 20.204,42.825 20.204,41.175 20.184,41.078 20.129,40.996 20.047,40.941 19.95,40.921 19.859,40.921 19.859,40.847 19.922,40.834 20.004,40.779 20.059,40.697 20.079,40.6 20.079,38.9 20.059,38.803 20.004,38.721 19.922,38.666 19.859,38.653 19.859,37.654 20,37.654 20.097,37.634 20.179,37.579 20.234,37.497 20.254,37.4 20.254,36.7 20.234,36.603 20.179,36.521 20.097,36.466 20,36.446 18,36.446 17.903,36.466 17.821,36.521 17.766,36.603 17.746,36.7 17.746,37.4 17.766,37.497 17.821,37.579 17.903,37.634 18,37.654 18.841,37.654 18.841,38.653 18.778,38.666 18.696,38.721 18.641,38.803 18.621,38.9 18.621,40.6 18.641,40.697 18.696,40.779 18.778,40.834 18.841,40.847 18.841,40.921 18.75,40.921 18.653,40.941 18.571,40.996 18.516,41.078 18.496,41.175 18.496,42.825 18.516,42.922 18.571,43.004 18.583,43.013 18.571,43.021 18.516,43.103 18.496,43.2 18.496,44.8 18.516,44.897 18.528,44.916 17.984,44.916 17.984,44.275 17.964,44.178 17.909,44.096 17.827,44.041 17.73,44.022 17.08,44.022 16.983,44.041 16.901,44.096 16.846,44.178 16.826,44.275 16.826,45.801 16.846,45.898 16.901,45.98 16.983,46.035 17.08,46.054 17.73,46.054 17.827,46.035 17.909,45.98 17.94,45.934 18.496,45.934 18.496,46.825 18.516,46.922 18.571,47.004 18.653,47.059 18.75,47.079 19.95,47.079

## Silkscreen, mask and mechanical layers (free items; w line width, h text height)
Top Overlay:
  text "WayWayWay" at 34.45,27.467 h0.8
Bottom Overlay:
  drawing of 3334 lines, arcs and shapes, not listed
  text "TP4" at 63.55,50.95 h0.8
  text "Squad" at 58.393,46.849 h2
  text "ALTAIR PDRO" at 70.89,46.845 h2
  text ".Revision" at 65.876,45.122 h1.5
  text "D.R., / P.D.B., / N.S." at 65.64,40.201 h2
  text "UVIC" at 70.54,38.545 h2
  text "5VSW" at 31.279,16.099 h0.6 r90
  text "VGND" at 19,15.75 h0.6
  text "10V Regulator" at 43.995,14.91 h0.6
Mechanical 1:
  lines w0.2: 3.75,0 70,0 ; 70,0 ccw(c70,4) 74,4 74,52 ccw(c70,52) 70,56 4,56 ccw(c4,52) 0,52 0,4 ccw(c4,4) 4,0 70,0

## Dimensions
4,0 to 4,56 on Mechanical 1
74,4 to 0,4 on Mechanical 1

## Text inside footprints (layer, text, board x,y; h text height)
D2: Mechanical 13 "RefDes2" at 62.528,24.885 h1.27 r180
J3A: Mechanical 13 "PCB EDGE" at 0.5,33.15 h1.02 r270
J3B: Mechanical 13 "PCB EDGE" at 0.4,13.3 h1.02 r270